# Altium PCB NCKH cap truong_Thien.PcbDoc
Units mm, origin at the board's own origin, x right, y up, seen from the top; angles counter-clockwise.
Board outline 86.18 x 59.79 mm, 2 copper layers (Top Layer, Bottom Layer); 16 components, 20 nets, 284 pads, 32 vias.
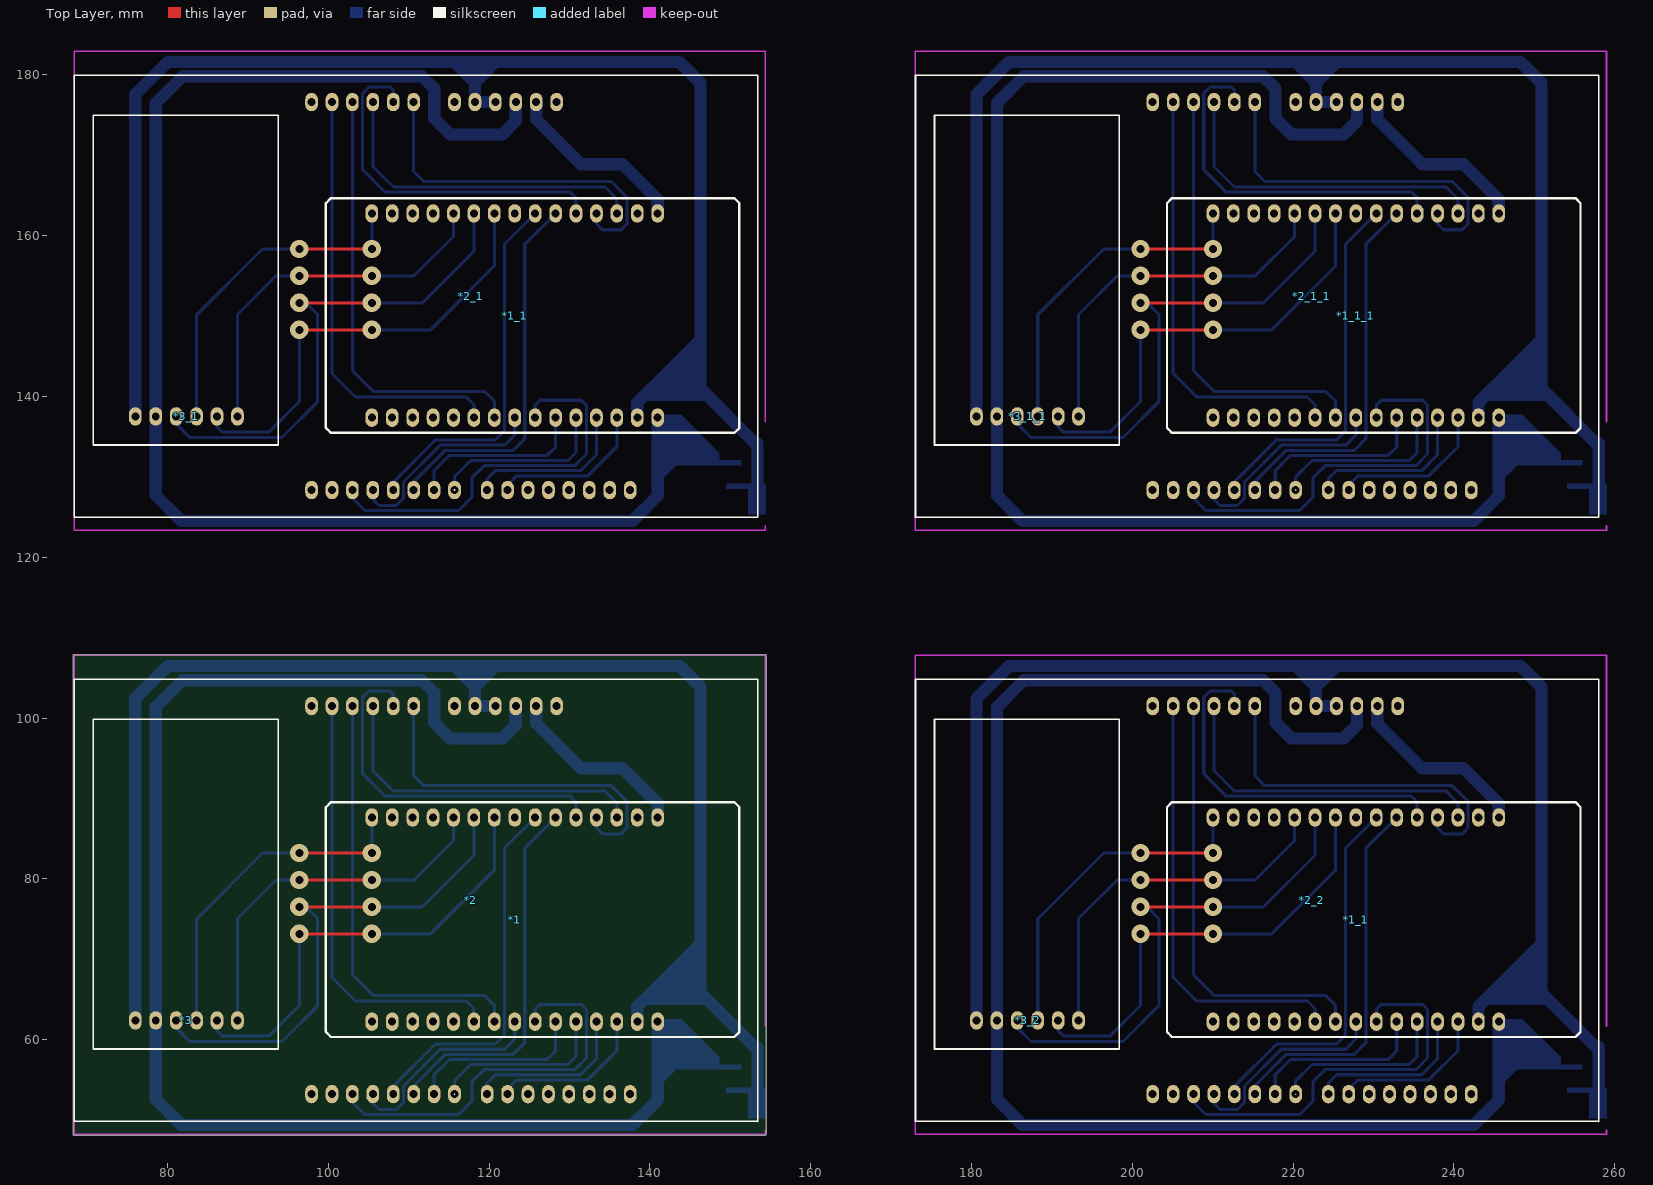
[diagram p0: Top Layer view]
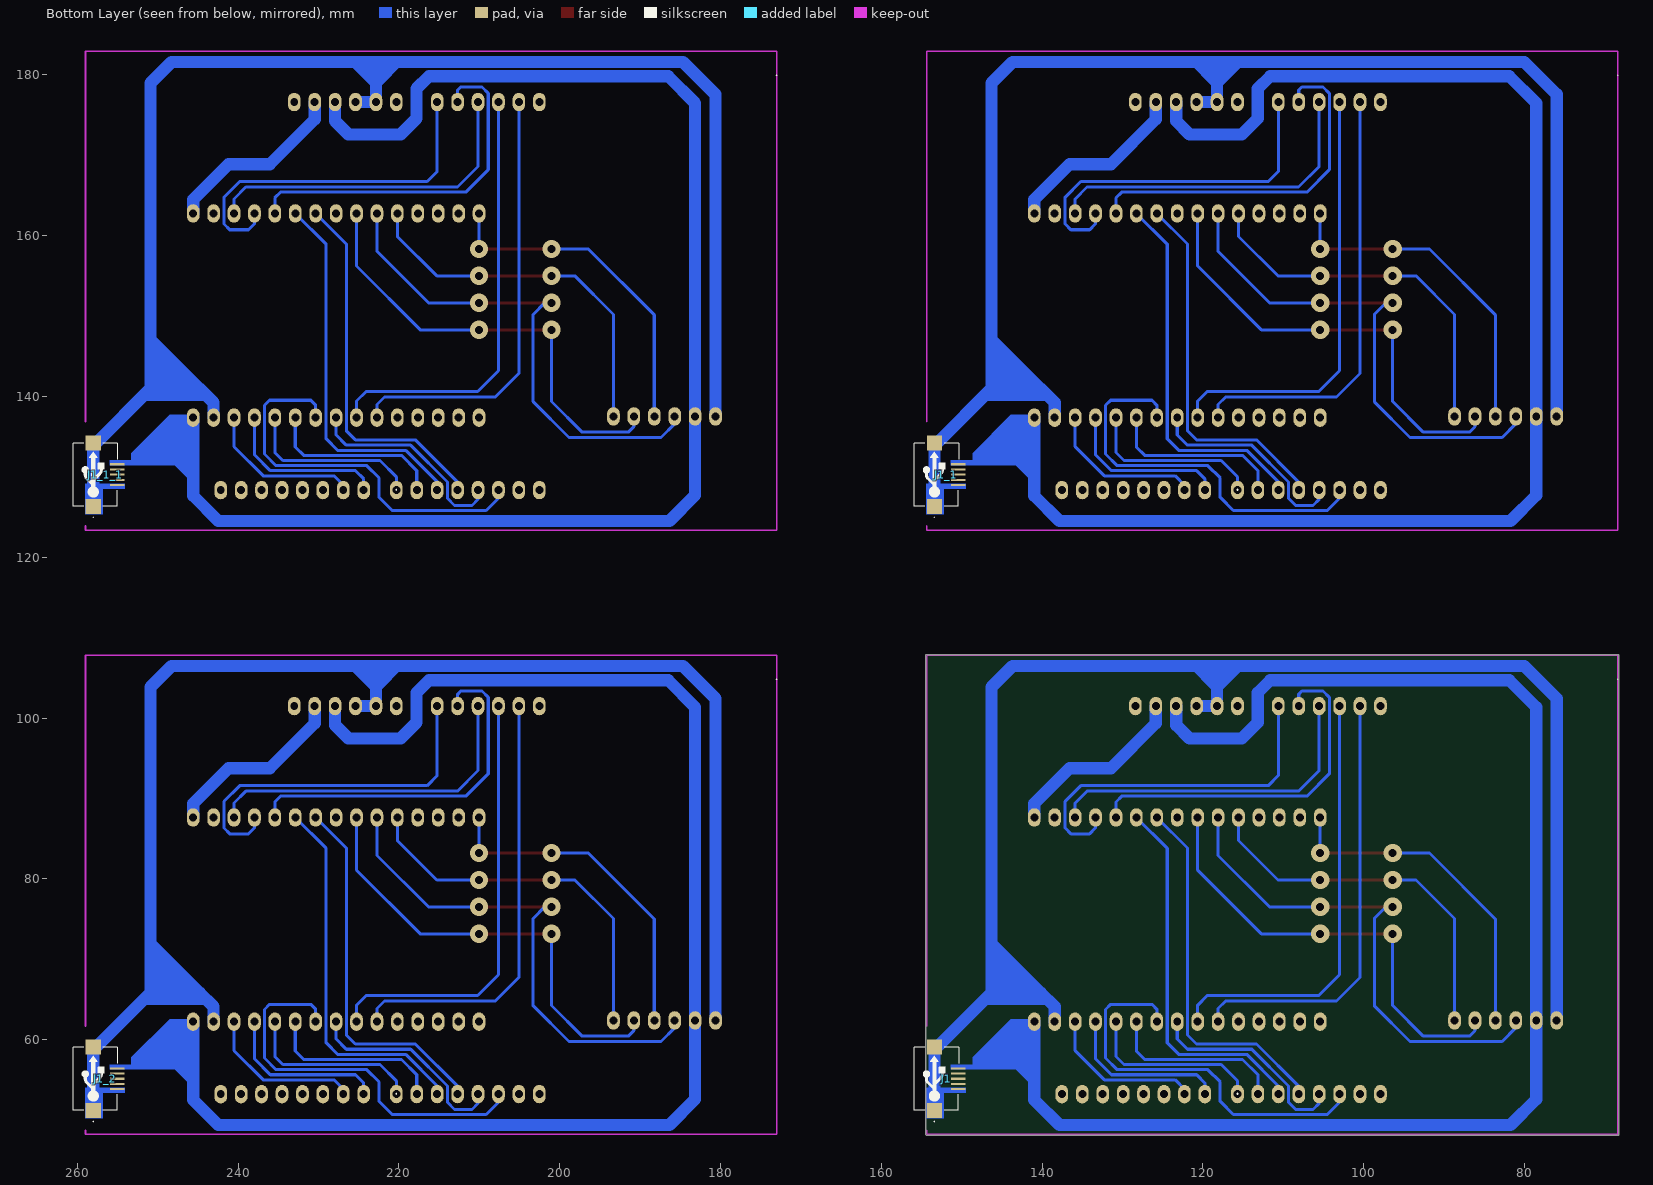
[diagram p1: Bottom Layer view, seen from below]

## Layer stack, top to bottom
Top Solder: solder mask 0.0102, Solder Resist, Dk 3.5
Top Layer: signal copper 0.0356
Dielectric 1: dielectric 0.32, FR-4, Dk 4.8
Bottom Layer: signal copper 0.0356
Bottom Solder: solder mask 0.0102, Solder Resist, Dk 3.5

## Board outline
68.276,48.209 ccw(c68.377,48.209) 68.377,48.109 154.33,48.109 ccw(c154.33,48.209) 154.343,48.11 ccw(c154.356,48.209) 154.456,48.209 154.456,61.697 ccw(c154.356,61.697) 154.456,61.698 154.456,107.798 ccw(c154.356,107.798) 154.356,107.898 68.377,107.898 ccw(c68.377,107.798) 68.276,107.798

## Design rules (kind name [scope] priority, off if disabled: settings)
Clearance [All] p1: gap=0.254 ignorepadtopadclearanceinfootprint=FALSE except(0: Arc-Hole Track-Hole SMDPad-Hole THPad-Hole Via-Hole Fill-Hole Poly-Hole Region-Hole Text-Hole)
PolygonConnect [All] p1: connectstyle=Relief reliefconductorwidth=0.254 reliefentries=4 polygonreliefangle="90 Angle" airgapwidth=0.254
RoutingVias [All] p1: holewidth=0.711 width=1.27 viastyle="Through Hole" minholewidth=0.711 minwidth=1.27 maxholewidth=0.711 maxwidth=1.27
SolderMaskExpansion [All] p1: expansion=0.102
Width [All] p1: maxlimit=2.54 minlimit=0.254 preferedwidth=0.381
30 further rules are at their usual default settings.

## Classes and differential pairs
component class "NCKH cap truong_Thien": *1 *2 *3

## Components (designator, comment, footprint, x,y, rotation, side; value= is the part's Value field where it differs from the comment)
*1 "Module ESP32" "Module ESP32" 124.46,75.565 r90 top
*1_1 "Module ESP32" "Module ESP32" 229.083,75.565 r90 top (schematic designator *1)
*1_1 "Module ESP32" "Module ESP32" 124.46,150.698 r90 top (schematic designator *1)
*1_1_1 "Module ESP32" "Module ESP32" 229.083,150.698 r90 top (schematic designator *1)
*2 "LCD TFT 3.5 Shield" "LCD TFT 3.5 Shield" 153.495,49.663 r90 top
*2_1 "LCD TFT 3.5 Shield" "LCD TFT 3.5 Shield" 153.495,124.796 r90 top (schematic designator *2)
*2_1_1 "LCD TFT 3.5 Shield" "LCD TFT 3.5 Shield" 258.118,124.796 r90 top (schematic designator *2)
*2_2 "LCD TFT 3.5 Shield" "LCD TFT 3.5 Shield" 258.118,49.663 r90 top (schematic designator *2)
*3 "Module MicroSD Adapter" "Module MicroSD Adapter" 93.65,99.847 r180 top
*3_1 "Module MicroSD Adapter" "Module MicroSD Adapter" 93.65,174.981 r180 top (schematic designator *3)
*3_1_1 "Module MicroSD Adapter" "Module MicroSD Adapter" 198.272,174.981 r180 top (schematic designator *3)
*3_2 "Module MicroSD Adapter" "Module MicroSD Adapter" 198.272,99.847 r180 top (schematic designator *3)
J1 "USB-5" USB-M1 150.423,55.13 r90 bottom
J1_1 "USB-5" USB-M1 150.423,130.264 r90 bottom (schematic designator J1)
J1_1_1 "USB-5" USB-M1 255.045,130.264 r90 bottom (schematic designator J1)
J1_2 "USB-5" USB-M1 255.045,55.13 r90 bottom (schematic designator J1)

## Footprints (in the part's own frame and the unit in brackets; to place one, negate y for a bottom-side part, rotate by r counter-clockwise, add the part's x,y. Pads: shape width x height; smd on the part's side, far side on the other; paste and mask are expansions set on the pad)
"LCD TFT 3.5 Shield" [mil]
  oval 90x62 hole 39: 0(2040.12,1088.11) 1(2040.12,1188.11) 2(2040.12,1388.11) 3(2040.12,1688.11) 4(2040.12,1788.11) 5(2040.12,1888.11) 6(2040.12,1988.11) 7(2040.12,2088.11) 8(139.76,828.11) 9(139.76,928.11) 10(139.76,1028.11) 11(139.76,1128.11) 12(139.76,1228.11) 13(139.76,1328.11) 14(140.12,1488.11) 15(140.12,1588.11) 16(140.12,1688.11) 17(140.12,1788.11) 18(140.12,1888.11) 19(140.12,1988.11) ""(139.76,728.11) ""(139.76,628.11) ""(140.12,2188.11) ""(140.12,2088.11) ""(2040.12,2188.11) ""(2040.12,988.11) ""(2040.12,1288.11) ""(2040.12,1488.11)
  silkscreen extent 6,3 2172,3350
"Module ESP32" [mil]
  oval 90x62 hole 39: 1(-525,750) 2(-525,650) 3(-525,550) 4(-525,450) 5(-525,350) 6(-525,250) 7(-525,150) 8(-525,50) 9(-525,-50) 10(-525,-150) 11(-525,-250) 12(-525,-350) 13(-525,-450) 14(-525,-550) 15(-525,-650) 16(475,-650) 17(475,-550) 18(475,-450) 19(475,-350) 20(475,-250) 21(475,-150) 22(475,-50) 23(475,50) 24(475,150) 25(475,250) 26(475,350) 27(475,450) 28(475,550) 29(475,650) 30(475,750)
  silkscreen extent -600,-1050 550,975, body extent -587,-1034 535,971, height 441
"Module MicroSD Adapter" [mil]
  oval 62x90 hole 39: 1(195,1475) 2(295,1475) 3(395,1475) 4(495,1475) 5(595,1475) 6(695,1475)
  silkscreen extent -5,1 901,1615
USB-M1 [mil]
  rect 10x70 smd: 1(51.18,0) 2(25.59,0) 3(0,0) 4(-25.59,0) 5(-50,0)
  rect 74.8x74.8 smd: 5(-155.51,116.84) 5(155.51,116.84)
  silkscreen extent -155,-1 155,215, body extent -157,5 158,218, height 107

## Part data
J1 J1_1 J1_1_1 J1_2: Manufacturer=FCI, Manufacturer Part Number=10118193-0001LF, Supplier Part Number 1=609-4616-1-ND, .Checked PCB=RF, .Checked SCH=MM, .Creator=MM, Category="Connectors, Interconnects", ComponentLink1Description=http://portal.fciconnect.com/Comergent//fci/drawing/10118193.pdf, ComponentLink1URL=http://portal.fciconnect.com/Comergent//fci/drawing/10118193.pdf, Connector Type="USB - micro B", Features="Shielded, Solder Retention", Gender=Receptacle, Ingress Protection=-, Mounting Type="Surface Mount, Right Angle, Horizontal", Number of Contacts=5, Packaging="Cut Tape (CT)", Pricing 1="1=0.46, 10=0.433, 25=0.3712, 50=0.3156, 100=0.3032, 250=0.27224, 500=0.25988 (USD)", RoHS="RoHS Compliant", Specifications="USB 2.0", Stock 1=28642, Supplier 1=Digi-Key

## Via types
v1: diameter 2.286, hole 0.991, Top Layer to Bottom Layer, 32 vias

## Nets (pads, with @x,y where several pads share a name; then routed paths per layer and width w, separated by ;. In a path a pad name is that pad's centre, name@x,y a point inside that pad or via, vN(x,y) a via of type N, cw(c..) or ccw(c..) an arc to the next point about the centre after c; other vN are vias at no path point)
3v3: *1.16 *2.0 | length 23.1
  Bottom Layer w1.524: *2.0 125.857,99.339 131.445,93.751 136.576,93.751 140.97,89.357 *1.16
cs_sd: *1.26 *3.1 | length 46.4
  Top Layer w0.381: v1(96.393,79.858) v1(105.41,79.858)
  Bottom Layer w0.381: *3.1 88.697,75.057 93.497,79.858 v1(96.393,79.858) ; v1(105.41,79.858) 110.668,79.858 115.57,84.76 *1.26
d0: *1.12 *2.13 | length 20.9
  Bottom Layer w0.381: *2.13 119.761,54.61 120.777,55.626 131.369,55.626 133.35,57.607 *1.12
d1: *1.13 *2.12 | length 19.8
  Bottom Layer w0.381: *2.12 122.301,53.848 123.444,54.991 132.258,54.991 135.89,58.623 *1.13
d2: *1.9 *2.19 | length 49.6
  Bottom Layer w0.381: *2.19 102.997,52.197 104.521,50.673 116.205,50.673 117.856,52.324 117.856,54.737 119.38,56.261 130.658,56.261 132.105,57.709 132.105,63.754 131.47,64.389 126.34,64.389 125.73,63.779 *1.9
d3: *1.8 *2.18 | length 26.1
  Bottom Layer w0.381: *2.18 105.537,52.07 106.299,51.308 108.458,51.308 109.347,52.197 109.347,54.229 113.919,58.801 121.92,58.801 123.19,60.071 *1.8
d4: *1.22 *2.17 | length 46.1
  Bottom Layer w0.381: *2.17 108.077,54.204 113.335,59.461 120.802,59.461 121.92,60.579 121.92,83.82 *1.22
d5: *1.21 *2.16 | length 46.7
  Bottom Layer w0.381: *2.16 110.617,54.238 114.545,58.166 123.012,58.166 124.435,59.588 124.435,83.795 *1.21
d6: *1.10 *2.15 | length 22.4
  Bottom Layer w0.381: *2.15 113.157,55.626 115.062,57.531 127.229,57.531 128.27,58.572 *1.10
d7: *1.11 *2.14 | length 22.4
  Bottom Layer w0.381: *2.14 115.697,54.864 117.729,56.896 129.819,56.896 130.81,57.887 *1.11
GND: *1.14 *2.2 *2.@120.777,101.482 *3.6 J1.5 | length 186.9
  Bottom Layer w1.524: *3.6 75.997,102.438 80.035,106.477 118.237,106.477 ; *2.@120.777,101.482 *2.2 118.237,106.477 ; *1.14 138.43,64.11 140.157,65.837 146.279,65.837 ; J1.5@153.391,51.18 153.391,59.08 153.035,59.08 146.279,65.837 ; 118.237,106.477 143.662,106.477 146.279,103.861 146.279,65.837
miso_sd: *1.25 *3.4 | length 63.9
  Top Layer w0.381: v1(96.393,76.505) v1(105.41,76.505)
  Bottom Layer w0.381: *3.4 81.077,61.468 82.779,59.766 94.234,59.766 98.679,64.211 98.679,75.057 97.231,76.505 v1(96.393,76.505) ; v1(105.41,76.505) 111.709,76.505 118.11,82.906 *1.25
mosi_sd: *1.30 *3.3 | length 42.2
  Top Layer w0.381: v1(96.393,83.21) v1(105.41,83.21)
  Bottom Layer w0.381: *3.3 83.617,75.006 91.821,83.21 v1(96.393,83.21) ; v1(105.41,83.21) *1.30
sck_sd: *1.24 *3.2 | length 56.4
  Top Layer w0.381: v1(96.393,73.152) v1(105.41,73.152)
  Bottom Layer w0.381: *3.2 86.157,61.112 86.843,60.427 92.583,60.427 96.393,64.237 v1(96.393,73.152) ; v1(105.41,73.152) 112.725,73.152 120.65,81.077 *1.24
tft_cs: *1.7 *2.6 | length 54.7
  Bottom Layer w0.381: *2.6 102.997,68.072 105.588,65.481 119.456,65.481 120.65,64.287 *1.7
tft_rd: *1.19 *2.3 | length 45.5
  Bottom Layer w0.381: *2.3 110.617,92.837 111.862,91.592 135.179,91.592 137.135,89.637 137.135,86.309 136.423,85.598 134.087,85.598 133.35,86.335 *1.19
tft_rs: *1.18 *2.5 | length 41.8
  Bottom Layer w0.381: *2.5 105.537,93.472 108.102,90.907 134.417,90.907 135.89,89.433 *1.18
tft_rst: *1.6 *2.7 | length 54.6
  Bottom Layer w0.381: *2.7 100.457,67.716 103.378,64.795 117.17,64.795 118.11,63.856 *1.6
tft_wr: *1.20 *2.4 | length 45.2
  Bottom Layer w0.381: *2.4 108.077,102.972 107.696,103.353 105.054,103.353 104.267,102.565 104.267,93.066 107.061,90.272 130.099,90.272 130.81,89.56 *1.20
VCC: *1.15 *2.1 *3.5 J1.1 | length 186.8
  Bottom Layer w1.524: *2.1 123.317,99.111 121.666,97.46 115.164,97.46 113.182,99.441 113.182,103.149 111.633,104.699 81.89,104.699 78.537,101.346 *3.5 78.537,52.578 81.737,49.378 137.846,49.378 140.97,52.502 *1.15 146.152,57.048 147.726,57.048
pads on no net: *1.1 *1.2 *1.3 *1.4 *1.5 *1.17 *1.23 *1.27 *1.28 *1.29 *1_1.1 *1_1.2 *1_1.3 *1_1.4 *1_1.5 *1_1.6 *1_1.7 *1_1.8 *1_1.9 *1_1.10 *1_1.11 *1_1.12 *1_1.13 *1_1.14 *1_1.15 *1_1.16 *1_1.17 *1_1.18 *1_1.19 *1_1.20 *1_1.21 *1_1.22 *1_1.23 *1_1.24 *1_1.25 *1_1.26 *1_1.27 *1_1.28 *1_1.29 *1_1.30 *1_1_1.1 *1_1_1.2 *1_1_1.3 *1_1_1.4 *1_1_1.5 *1_1_1.6 *1_1_1.7 *1_1_1.8 *1_1_1.9 *1_1_1.10 *1_1_1.11 *1_1_1.12 *1_1_1.13 *1_1_1.14 *1_1_1.15 *1_1_1.16 *1_1_1.17 *1_1_1.18 *1_1_1.19 *1_1_1.20 *1_1_1.21 *1_1_1.22 *1_1_1.23 *1_1_1.24 *1_1_1.25 *1_1_1.26 *1_1_1.27 *1_1_1.28 *1_1_1.29 *1_1_1.30 *2.8 *2.9 *2.10 *2.11 *2.@97.917,53.222 *2.@97.917,101.482 *2.@100.457,53.222 *2.@115.697,101.482 *2.@128.397,101.482 *2.@135.001,53.213 *2.@137.541,53.213 *2_1. *2_1.0 *2_1.1 *2_1.2 *2_1.3 *2_1.4 *2_1.5 *2_1.6 *2_1.7 *2_1.8 *2_1.9 *2_1.10 *2_1.11 *2_1.12 *2_1.13 *2_1.14 *2_1.15 *2_1.16 *2_1.17 *2_1.18 *2_1.19 *2_1_1. *2_1_1.0 *2_1_1.1 *2_1_1.2 *2_1_1.3 *2_1_1.4 *2_1_1.5 *2_1_1.6 *2_1_1.7 *2_1_1.8 *2_1_1.9 *2_1_1.10 *2_1_1.11 *2_1_1.12 *2_1_1.13 *2_1_1.14 *2_1_1.15 *2_1_1.16 *2_1_1.17 *2_1_1.18 *2_1_1.19 *2_2. *2_2.0 *2_2.1 *2_2.2 *2_2.3 *2_2.4 *2_2.5 *2_2.6 *2_2.7 *2_2.8 *2_2.9 *2_2.10 *2_2.11 *2_2.12 *2_2.13 *2_2.14 *2_2.15 *2_2.16 *2_2.17 *2_2.18 *2_2.19 *3_1.1 *3_1.2 *3_1.3 *3_1.4 *3_1.5 *3_1.6 *3_1_1.1 *3_1_1.2 *3_1_1.3 *3_1_1.4 *3_1_1.5 *3_1_1.6 *3_2.1 *3_2.2 *3_2.3 *3_2.4 *3_2.5 *3_2.6 J1.2 J1.3 J1.4 J1_1.1 J1_1.2 J1_1.3 J1_1.4 J1_1.5 J1_1_1.1 J1_1_1.2 J1_1_1.3 J1_1_1.4 J1_1_1.5 J1_2.1 J1_2.2 J1_2.3 J1_2.4 J1_2.5
copper on no net: | length 3304.6
  Top Layer w0.381: v1(96.393,148.285) v1(105.41,148.285) ; v1(96.393,151.638) v1(105.41,151.638) ; v1(96.393,154.991) v1(105.41,154.991) ; v1(96.393,158.344) v1(105.41,158.344) ; v1(201.016,73.152) v1(210.033,73.152) ; v1(201.016,76.505) v1(210.033,76.505) ; v1(201.016,79.858) v1(210.033,79.858) ; v1(201.016,83.21) v1(210.033,83.21) ; v1(201.016,148.285) v1(210.033,148.285) ; v1(201.016,151.638) v1(210.033,151.638) ; v1(201.016,154.991) v1(210.033,154.991) ; v1(201.016,158.344) v1(210.033,158.344)
  Bottom Layer w0.381: 81.077,137.516 81.077,136.601 82.779,134.899 94.234,134.899 98.679,139.344 98.679,150.19 97.231,151.638 v1(96.393,151.638) ; 83.617,137.516 83.617,150.139 91.821,158.344 v1(96.393,158.344) ; 86.157,137.516 86.157,136.246 86.843,135.56 92.583,135.56 96.393,139.37 v1(96.393,148.285) ; 88.697,137.516 88.697,150.19 93.497,154.991 v1(96.393,154.991) ; 100.457,176.615 100.457,142.85 103.378,139.929 117.17,139.929 118.11,138.989 118.11,137.363 ; 102.997,128.355 102.997,127.33 104.521,125.806 116.205,125.806 117.856,127.457 117.856,129.87 119.38,131.394 130.658,131.394 132.105,132.842 132.105,138.887 131.47,139.522 126.34,139.522 125.73,138.913 125.73,137.363 ; 102.997,176.615 102.997,143.205 105.588,140.614 119.456,140.614 120.65,139.421 120.65,137.363 ; v1(105.41,148.285) 112.725,148.285 120.65,156.21 120.65,162.763 ; v1(105.41,151.638) 111.709,151.638 118.11,158.039 118.11,162.763 ; v1(105.41,154.991) 110.668,154.991 115.57,159.893 115.57,162.763 ; v1(105.41,158.344) 105.41,162.763 ; 105.537,128.355 105.537,127.203 106.299,126.441 108.458,126.441 109.347,127.33 109.347,129.362 113.919,133.934 121.92,133.934 123.19,135.204 123.19,137.363 ; 105.537,176.615 105.537,168.605 108.102,166.04 134.417,166.04 135.89,164.567 135.89,162.763 ; 108.077,128.355 108.077,129.337 113.335,134.595 120.802,134.595 121.92,135.712 121.92,158.953 125.73,162.763 ; 108.077,176.615 108.077,178.105 107.696,178.486 105.054,178.486 104.267,177.698 104.267,168.199 107.061,165.405 130.099,165.405 130.81,164.694 130.81,162.763 ; 110.617,128.355 110.617,129.371 114.545,133.299 123.012,133.299 124.435,134.722 124.435,158.928 128.27,162.763 ; 110.617,176.615 110.617,167.97 111.862,166.726 135.179,166.726 137.135,164.77 137.135,161.442 136.423,160.731 134.087,160.731 133.35,161.468 133.35,162.763 ; 113.157,128.355 113.157,130.759 115.062,132.664 127.229,132.664 128.27,133.706 128.27,137.363 ; 115.697,128.355 115.697,129.997 117.729,132.029 129.819,132.029 130.81,133.02 130.81,137.363 ; 119.761,128.346 119.761,129.743 120.777,130.759 131.369,130.759 133.35,132.74 133.35,137.363 ; 122.301,128.346 122.301,128.981 123.444,130.124 132.258,130.124 135.89,133.756 135.89,137.363 ; 185.699,62.382 185.699,61.468 187.401,59.766 198.857,59.766 203.302,64.211 203.302,75.057 201.854,76.505 v1(201.016,76.505) ; 185.699,137.516 185.699,136.601 187.401,134.899 198.857,134.899 203.302,139.344 203.302,150.19 201.854,151.638 v1(201.016,151.638) ; 188.239,62.382 188.239,75.006 196.444,83.21 v1(201.016,83.21) ; 188.239,137.516 188.239,150.139 196.444,158.344 v1(201.016,158.344) ; 190.779,62.382 190.779,61.112 191.465,60.427 197.206,60.427 201.016,64.237 v1(201.016,73.152) ; 190.779,137.516 190.779,136.246 191.465,135.56 197.206,135.56 201.016,139.37 v1(201.016,148.285) ; 193.319,62.382 193.319,75.057 198.12,79.858 v1(201.016,79.858) ; 193.319,137.516 193.319,150.19 198.12,154.991 v1(201.016,154.991) ; 205.08,101.482 205.08,67.716 208.001,64.795 221.793,64.795 222.733,63.856 222.733,62.23 ; 205.08,176.615 205.08,142.85 208.001,139.929 221.793,139.929 222.733,138.989 222.733,137.363 ; 207.62,53.222 207.62,52.197 209.144,50.673 220.828,50.673 222.479,52.324 222.479,54.737 224.003,56.261 235.28,56.261 236.728,57.709 236.728,63.754 236.093,64.389 230.962,64.389 230.353,63.779 230.353,62.23 ; 207.62,101.482 207.62,68.072 210.21,65.481 224.079,65.481 225.273,64.287 225.273,62.23 ; 207.62,128.355 207.62,127.33 209.144,125.806 220.828,125.806 222.479,127.457 222.479,129.87 224.003,131.394 235.28,131.394 236.728,132.842 236.728,138.887 236.093,139.522 230.962,139.522 230.353,138.913 230.353,137.363 ; 207.62,176.615 207.62,143.205 210.21,140.614 224.079,140.614 225.273,139.421 225.273,137.363 ; v1(210.033,73.152) 217.348,73.152 225.273,81.077 225.273,87.63 ; v1(210.033,76.505) 216.332,76.505 222.733,82.906 222.733,87.63 ; v1(210.033,79.858) 215.29,79.858 220.193,84.76 220.193,87.63 ; v1(210.033,83.21) 210.033,87.63 ; v1(210.033,148.285) 217.348,148.285 225.273,156.21 225.273,162.763 ; v1(210.033,151.638) 216.332,151.638 222.733,158.039 222.733,162.763 ; v1(210.033,154.991) 215.29,154.991 220.193,159.893 220.193,162.763 ; v1(210.033,158.344) 210.033,162.763 ; 210.16,53.222 210.16,52.07 210.922,51.308 213.081,51.308 213.97,52.197 213.97,54.229 218.542,58.801 226.543,58.801 227.813,60.071 227.813,62.23 ; 210.16,101.482 210.16,93.472 212.725,90.907 239.039,90.907 240.513,89.433 240.513,87.63 ; 210.16,128.355 210.16,127.203 210.922,126.441 213.081,126.441 213.97,127.33 213.97,129.362 218.542,133.934 226.543,133.934 227.813,135.204 227.813,137.363 ; 210.16,176.615 210.16,168.605 212.725,166.04 239.039,166.04 240.513,164.567 240.513,162.763 ; 212.7,53.222 212.7,54.204 217.957,59.461 225.425,59.461 226.543,60.579 226.543,83.82 230.353,87.63 ; 212.7,101.482 212.7,102.972 212.319,103.353 209.677,103.353 208.89,102.565 208.89,93.066 211.684,90.272 234.721,90.272 235.433,89.56 235.433,87.63 ; 212.7,128.355 212.7,129.337 217.957,134.595 225.425,134.595 226.543,135.712 226.543,158.953 230.353,162.763 ; 212.7,176.615 212.7,178.105 212.319,178.486 209.677,178.486 208.89,177.698 208.89,168.199 211.684,165.405 234.721,165.405 235.433,164.694 235.433,162.763 ; 215.24,53.222 215.24,54.238 219.168,58.166 227.635,58.166 229.057,59.588 229.057,83.795 232.893,87.63 ; 215.24,101.482 215.24,92.837 216.484,91.592 239.801,91.592 241.757,89.637 241.757,86.309 241.046,85.598 238.709,85.598 237.973,86.335 237.973,87.63 ; 215.24,128.355 215.24,129.371 219.168,133.299 227.635,133.299 229.057,134.722 229.057,158.928 232.893,162.763 ; 215.24,176.615 215.24,167.97 216.484,166.726 239.801,166.726 241.757,164.77 241.757,161.442 241.046,160.731 238.709,160.731 237.973,161.468 237.973,162.763 ; 217.78,53.222 217.78,55.626 219.685,57.531 231.851,57.531 232.893,58.572 232.893,62.23 ; 217.78,128.355 217.78,130.759 219.685,132.664 231.851,132.664 232.893,133.706 232.893,137.363 ; 220.32,53.222 220.32,54.864 222.352,56.896 234.442,56.896 235.433,57.887 235.433,62.23 ; 220.32,128.355 220.32,129.997 222.352,132.029 234.442,132.029 235.433,133.02 235.433,137.363 ; 224.384,53.213 224.384,54.61 225.4,55.626 235.991,55.626 237.973,57.607 237.973,62.23 ; 224.384,128.346 224.384,129.743 225.4,130.759 235.991,130.759 237.973,132.74 237.973,137.363 ; 226.924,53.213 226.924,53.848 228.067,54.991 236.88,54.991 240.513,58.623 240.513,62.23 ; 226.924,128.346 226.924,128.981 228.067,130.124 236.88,130.124 240.513,133.756 240.513,137.363
  Bottom Layer w1.524: 75.997,137.516 75.997,177.571 80.035,181.61 118.237,181.61 ; 120.777,176.615 118.237,176.615 118.237,181.61 ; 123.317,176.615 123.317,174.244 121.666,172.593 115.164,172.593 113.182,174.574 113.182,178.283 111.633,179.832 81.89,179.832 78.537,176.479 78.537,137.516 78.537,127.711 81.737,124.511 137.846,124.511 140.97,127.635 140.97,137.363 146.152,132.182 147.726,132.182 ; 125.857,176.615 125.857,174.473 131.445,168.885 136.576,168.885 140.97,164.49 140.97,162.763 ; 138.43,137.363 138.43,139.243 140.157,140.97 146.279,140.97 ; 153.391,126.314 153.391,134.214 153.035,134.214 146.279,140.97 ; 180.619,62.382 180.619,102.438 184.658,106.477 222.86,106.477 ; 180.619,137.516 180.619,177.571 184.658,181.61 222.86,181.61 ; 225.4,101.482 222.86,101.482 222.86,106.477 ; 225.4,176.615 222.86,176.615 222.86,181.61 ; 227.94,101.482 227.94,99.111 226.289,97.46 219.786,97.46 217.805,99.441 217.805,103.149 216.256,104.699 186.512,104.699 183.159,101.346 183.159,62.382 183.159,52.578 186.36,49.378 242.468,49.378 245.593,52.502 245.593,62.23 250.774,57.048 252.349,57.048 ; 227.94,176.615 227.94,174.244 226.289,172.593 219.786,172.593 217.805,174.574 217.805,178.283 216.256,179.832 186.512,179.832 183.159,176.479 183.159,137.516 183.159,127.711 186.36,124.511 242.468,124.511 245.593,127.635 245.593,137.363 250.774,132.182 252.349,132.182 ; 230.48,101.482 230.48,99.339 236.068,93.751 241.198,93.751 245.593,89.357 245.593,87.63 ; 230.48,176.615 230.48,174.473 236.068,168.885 241.198,168.885 245.593,164.49 245.593,162.763 ; 243.053,62.23 243.053,64.11 244.78,65.837 250.901,65.837 ; 243.053,137.363 243.053,139.243 244.78,140.97 250.901,140.97 ; 258.013,51.18 258.013,59.08 257.658,59.08 250.901,65.837 ; 258.013,126.314 258.013,134.214 257.658,134.214 250.901,140.97 ; 118.237,181.61 143.662,181.61 146.279,178.994 146.279,140.97 ; 222.86,106.477 248.285,106.477 250.901,103.861 250.901,65.837 ; 222.86,181.61 248.285,181.61 250.901,178.994 250.901,140.97

## Keep-outs
Keep-Out Layer:
  lines w0.2: 154.33,48.209 68.377,48.209 68.377,107.798 154.356,107.798 154.356,61.697 ; 154.33,123.342 68.377,123.342 68.377,182.931 154.356,182.931 154.356,136.83 ; 154.356,48.209 154.356,48.743 ; 154.356,123.342 154.356,123.876 ; 258.953,48.209 172.999,48.209 172.999,107.798 258.978,107.798 258.978,61.697 ; 258.953,123.342 172.999,123.342 172.999,182.931 258.978,182.931 258.978,136.83 ; 258.978,48.209 258.978,48.743 ; 258.978,123.342 258.978,123.876 ; 154.356,61.697 154.356,61.697 ; 154.356,136.83 154.356,136.83 ; 258.978,61.697 258.978,61.697 ; 258.978,136.83 258.978,136.83

## Other copper
Bottom Layer:
  region: 253.263,56.286 255.981,56.286 255.981,56.896 253.263,56.896
  region: 253.263,57.81 252.044,57.81 252.044,56.286 253.263,56.286
  region: 256.827,54.004 254.11,54.004 254.11,53.395 256.827,53.395
  region: 256.827,54.004 259.025,54.004 259.029,54 259.029,50.216 256.845,50.216 256.827,50.233
  region: 244.145,66.192 251.638,73.685 251.638,66.142 252.171,65.608
  region: 251.165,72.914 251.638,72.441 251.638,64.338 243.865,64.338 243.815,64.287
  region: 253.263,56.286 244.983,56.286 244.983,62.56 248.514,62.56 253.263,57.81
  region: 252.12,55.118
  region: 219.685,106.07 222.098,103.657 223.622,103.657 226.035,106.07
  region: 248.082,56.49 245.872,56.49 245.643,56.261 245.643,54.483 246.075,54.483
  region: 248.082,131.623 245.872,131.623 245.643,131.394 245.643,129.616 246.075,129.616
  region: 219.685,181.204 222.098,178.791 223.622,178.791 226.035,181.204
  region: 252.12,130.251
  region: 253.263,131.42 244.983,131.42 244.983,137.693 248.514,137.693 253.263,132.944
  region: 251.165,148.047 251.638,147.574 251.638,139.471 243.865,139.471 243.815,139.421
  region: 244.145,141.326 251.638,148.819 251.638,141.275 252.171,140.741
  region: 256.827,129.138 259.025,129.138 259.029,129.134 259.029,125.349 256.845,125.349 256.827,125.366
  region: 256.827,129.138 254.11,129.138 254.11,128.528 256.827,128.528
  region: 253.263,132.944 252.044,132.944 252.044,131.42 253.263,131.42
  region: 253.263,131.42 255.981,131.42 255.981,132.029 253.263,132.029
  region: 148.641,131.42 151.359,131.42 151.359,132.029 148.641,132.029
  region: 148.641,132.944 147.422,132.944 147.422,131.42 148.641,131.42
  region: 152.205,129.138 149.487,129.138 149.487,128.528 152.205,128.528
  region: 152.205,129.138 154.403,129.138 154.407,129.134 154.407,125.349 152.222,125.349 152.205,125.366
  region: 139.522,141.326 147.015,148.819 147.015,141.275 147.549,140.741
  region: 146.542,148.047 147.015,147.574 147.015,139.471 139.243,139.471 139.192,139.421
  region: 148.641,131.42 140.36,131.42 140.36,137.693 143.891,137.693 148.641,132.944
  region: 147.498,130.251
  region: 115.062,181.204 117.475,178.791 118.999,178.791 121.412,181.204
  region: 143.459,131.623 141.249,131.623 141.021,131.394 141.021,129.616 141.453,129.616
  region net VCC: 143.459,56.49 141.249,56.49 141.021,56.261 141.021,54.483 141.453,54.483
  region net GND: 115.062,106.07 117.475,103.657 118.999,103.657 121.412,106.07
  region: 147.498,55.118
  region net VCC: 148.641,56.286 140.36,56.286 140.36,62.56 143.891,62.56 148.641,57.81
  region net GND: 146.542,72.914 147.015,72.441 147.015,64.338 139.243,64.338 139.192,64.287
  region net GND: 139.522,66.192 147.015,73.685 147.015,66.142 147.549,65.608
  region net GND: 152.205,54.004 154.403,54.004 154.407,54 154.407,50.216 152.222,50.216 152.205,50.233
  region net GND: 152.205,54.004 149.487,54.004 149.487,53.395 152.205,53.395
  region net VCC: 148.641,57.81 147.422,57.81 147.422,56.286 148.641,56.286
  region net VCC: 148.641,56.286 151.359,56.286 151.359,56.896 148.641,56.896